# Altium PCB 1.8A.PcbDoc
Units mm, origin at the board's own origin, x right, y up, seen from the top; angles counter-clockwise.
Board outline 69 x 27 mm, 2 copper layers (Top Layer, Bottom Layer); 22 components, 24 nets, 63 pads, 30 vias.
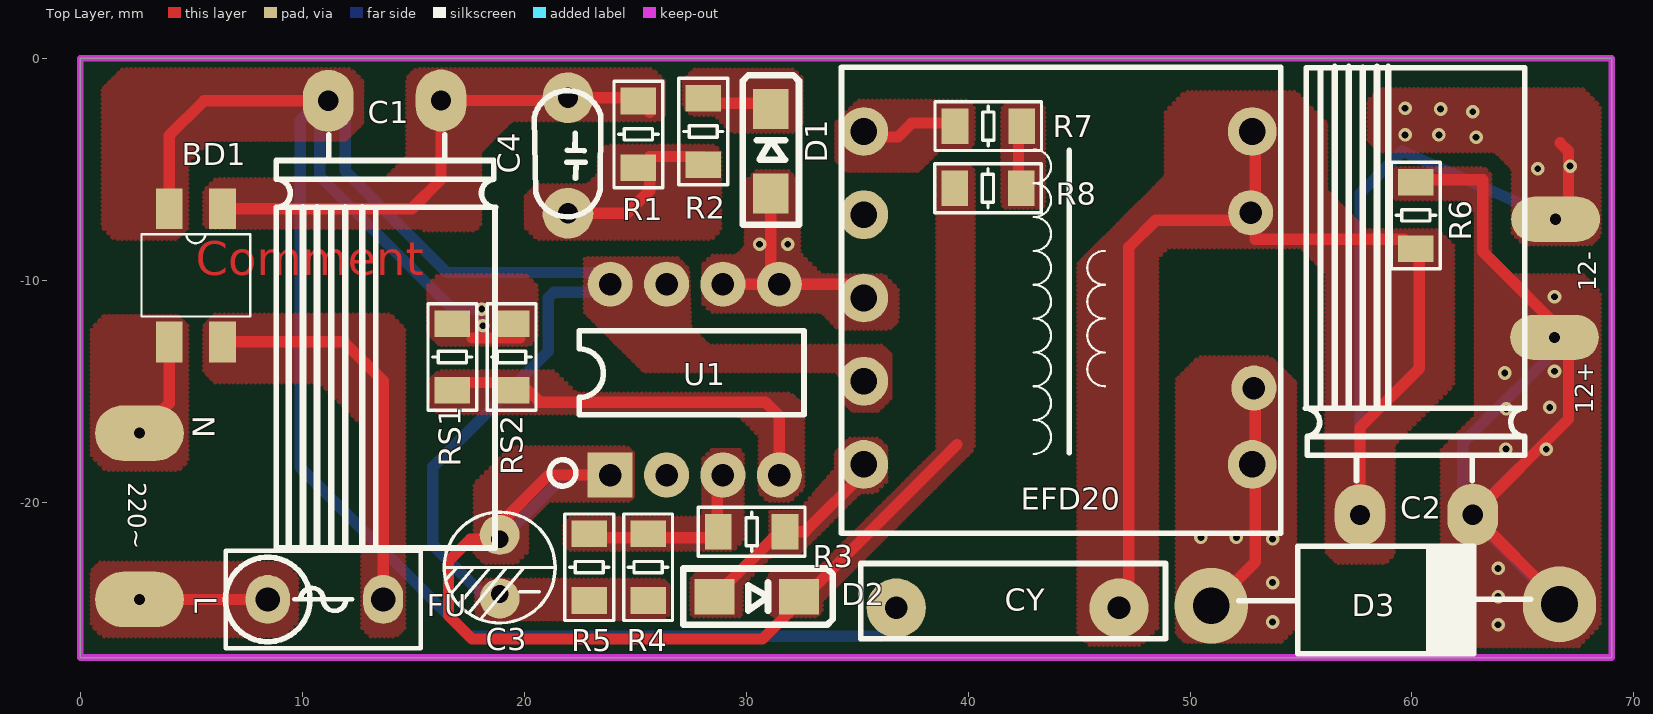
[diagram p0: Top Layer view]
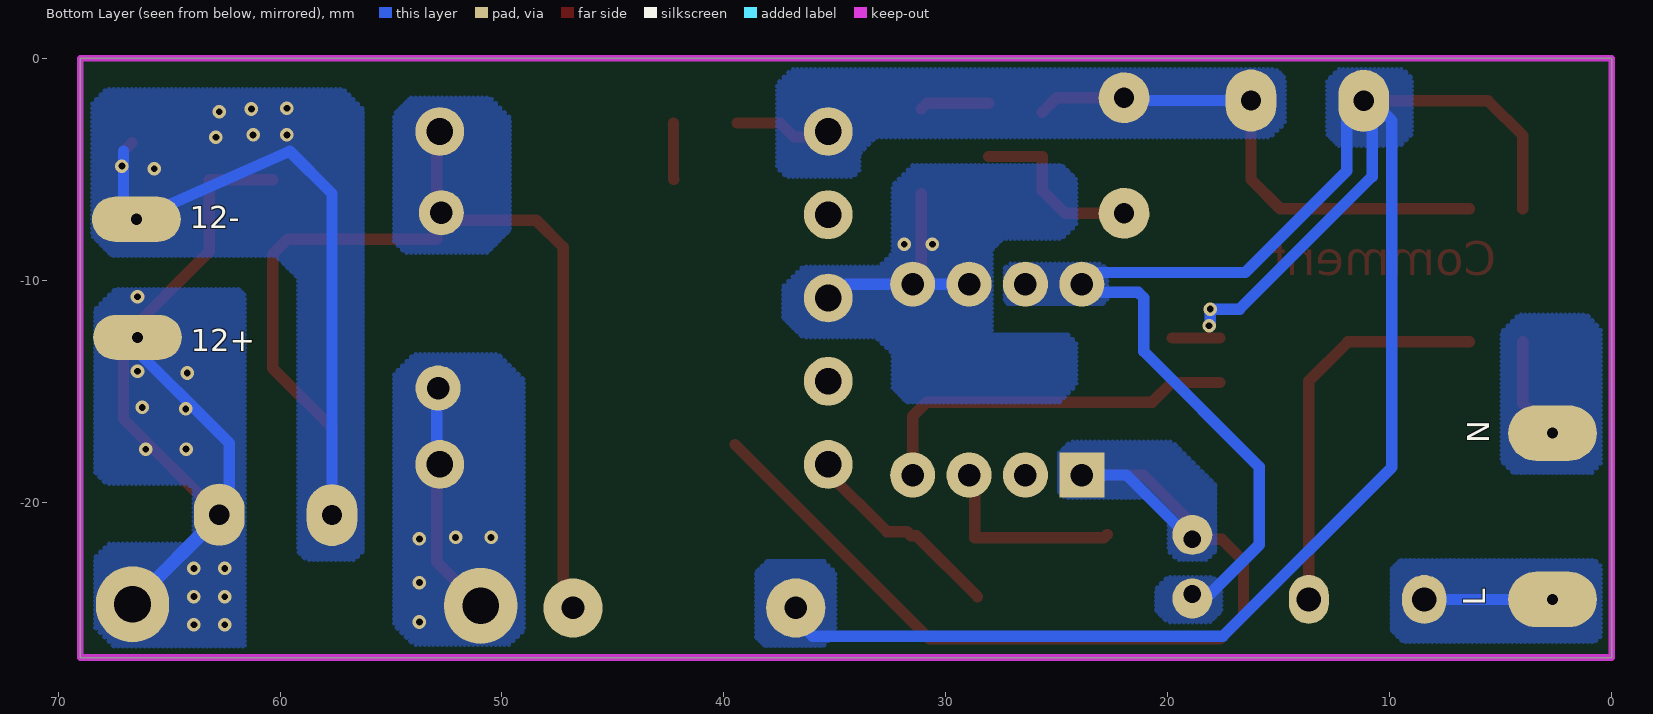
[diagram p1: Bottom Layer view, seen from below]

## Layer stack, top to bottom
Top Solder: solder mask 0.0102, Solder Resist, Dk 3.5
Top Layer: signal copper 0.0356
Dielectric 1: dielectric 0.32, FR-4, Dk 4.8
Bottom Layer: signal copper 0.0356
Bottom Solder: solder mask 0.0102, Solder Resist, Dk 3.5

## Board outline
0,-27 69,-27 69,0 0,0

## Design rules (kind name [scope] priority, off if disabled: settings)
Clearance [All] p1: gap=0.254 ignorepadtopadclearanceinfootprint=FALSE except(0: Arc-Hole Track-Hole SMDPad-Hole THPad-Hole Via-Hole Fill-Hole Poly-Hole Region-Hole Text-Hole)
PolygonConnect [All] p1: connectstyle=Direct reliefconductorwidth=0.254 reliefentries=4 polygonreliefangle="90 Angle" airgapwidth=0.254
RoutingVias [All] p1: holewidth=0.711 width=1.27 viastyle="Through Hole" minholewidth=0.711 minwidth=1.27 maxholewidth=0.711 maxwidth=1.27
SolderMaskExpansion [All] p1: expansion=0.102
Width [All] p1: maxlimit=0.508 minlimit=0.254 preferedwidth=0.254
30 further rules are at their usual default settings.

## Components (designator, comment, footprint, x,y, rotation, side; value= is the part's Value field where it differs from the comment)
BD1 "Comment" MBL10S 5.207,-9.779 r0 top
C1 "Comment" 电解电容10*13mm 13.716,-1.913 r180 top
C2 "Comment" 电解电容10*13mm 60.198,-20.574 r0 top
C3 "Comment" 直插电解电容5*11mm 18.899,-22.908 r90 top
C4 "Comment" CAP 25.273,-4.763 r90 top
CY "Comment" 222M/400v 41.783,-24.765 r0 top
D1 "Comment" SMAF 31.115,-4.191 r270 top
D2 "Comment" SMAF 30.48,-24.257 r180 top
D3 "Comment" DO-201AD/SR5100 58.801,-24.638 r0 top
EFD20 "Comment" EFD20 44.3,-10.8 r0 top
FU "Comment" 方块保险丝 11.049,-24.384 r0 top
R1 "Comment" R1206 25.146,-3.429 r90 top
R2 "Comment" R1206 28.067,-3.302 r90 top
R3 "Comment" R1206 30.25,-21.33 r0 top
R4 "Comment" R1206 25.58,-22.93 r90 top
R5 "Comment" R1206 22.932,-22.93 r90 top
R6 "Comment" R1206 60.18,-7.08 r270 top
R7 "Comment" R1206 40.911,-3.054 r0 top
R8 "Comment" R1206 40.894,-5.854 r0 top
RS1 "Comment" R1206 16.764,-13.462 r90 top
RS2 "Comment" R1206 19.431,-13.462 r90 top
U1 "Comment" DIP-8 27.686,-14.478 r90 top

## Footprints (in the part's own frame and the unit in brackets; to place one, negate y for a bottom-side part, rotate by r counter-clockwise, add the part's x,y. Pads: shape width x height; smd on the part's side, far side on the other; paste and mask are expansions set on the pad)
222M/400v [mil]
  round 105 hole 40: 1(-197.5,0) 2(197.5,0)
  silkscreen extent -261,-54 280,79
CAP [mil]
  round 90 hole 36: 1(-87.5,130) 2(117.5,130)
  silkscreen extent -94,72 130,190
DIP-8 [mil]
  rect 80x80 hole 40: 1(-169.29,150)
  round 80 hole 40: 2(-169.29,50) 3(-169.29,-50) 4(-169.29,-150) 5(169.29,-150) 6(169.29,-50) 7(169.29,50) 8(169.29,150)
  silkscreen extent -189,-194 87,258
DO-201AD/SR5100 [mil]
  oval 130x135 hole 65: 1(-308.75,-1.25) 2(308.75,1.25)
  silkscreen extent -260,-86 258,104
EFD20 [mm]
  round 2.2 hole 1.2: 1(-9,7.5) 2(-9,3.75) 3(-9,0) 4(-9,-3.75) 5(-9,-7.5) 6(8.5,-7.5) 7(8.5,7.5)
  silkscreen extent -10,-10.6 9.78,10.4
MBL10S [mm]
  rect 1.2x1.84 smd: 1(-1.2,3) 2(-1.2,-3) 3(1.2,3) 4(1.2,-3)
  silkscreen extent -2.44,-1.85 2.46,1.85
R1206 [mm]
  rect 1.2x1.6 smd: 1(-1.5,0) 2(1.5,0)
  silkscreen extent -2.4,-1.1 2.4,1.1
SMAF [mm]
  rect 1.8x1.6 smd: 1(-1.9,0) 2(1.9,0)
  silkscreen extent -3.42,-1.27 3.31,1.27
方块保险丝 [mm]
  oval 2x2.2 hole 1.1: 1(-2.6,0)
  oval 1.8x2.2 hole 1.1: 2(2.6,0)
  silkscreen extent -4.5,-2.2 4.3,2.2
电解电容10*13mm [mil]
  oval 90x110 hole 36: 1(100,0.31) 2(-100,-0.31)
  silkscreen extent -197,60 192,793
直插电解电容5*11mm [mm]
  round 1.8 hole 0.8 copper offset 0.2,0: 1(1.232,0)
  round 1.8 hole 0.8 copper offset -0.2,0: 2(-1.232,0)
  silkscreen extent -2.54,-2.5 2.46,2.5

## Free pads (board coordinates)
  oval 4x2.5 hole 0.5 unplated: ""(2.667,-24.384) ""(2.667,-16.891)
  round 2.032 hole 1.016 unplated: ""(52.73,-6.96) ""(52.88,-14.86)
  oval 4x2.032 hole 0.5 unplated: ""(66.421,-12.573) ""(66.47,-7.254)

## Via types
v1: diameter 0.61, hole 0.305, Top Layer to Bottom Layer, tented both sides, 30 vias

## Nets (pads, with @x,y where several pads share a name; then routed paths per layer and width w, separated by ;. In a path a pad name is that pad's centre, name@x,y a point inside that pad or via, vN(x,y) a via of type N, cw(c..) or ccw(c..) an arc to the next point about the centre after c; other vN are vias at no path point)
1: FU.1 pad.@2.667,-24.384 | length 11.6
  Top Layer w0.508: pad.@2.667,-24.384 FU.1
  Bottom Layer w0.508: pad.@2.667,-24.384 FU.1
2: BD1.3 C1.2 C4.2 EFD20.1 R1.2 R7.1 | length 33.7
  Top Layer w0.508: BD1.3 14.938,-6.779 16.256,-5.461 C1.2 21.844,-1.905 C4.2 25.003,-1.778 R1.2@25.654,-2.429 ; EFD20.1@35.442,-3.549 36.837,-3.549 37.465,-2.921 R7.1@39.411,-2.921
  Bottom Layer w0.508: C1.2 21.844,-1.905 C4.2
3: C4.1 R1.1 R2.1 | length 8.1
  Top Layer w0.508: C4.1 24.638,-6.985 25.654,-5.969 25.654,-4.429 R2.1@28.067,-4.429
4: D1.1 R2.2 | length 3.2
  Top Layer w0.508: R2.2@28.067,-2.032 30.856,-2.032 D1.1
5: D1.2 EFD20.3 U1.5 U1.6 | length 17.1
  Top Layer w0.508: U1.6 U1.5 ; D1.2 31.115,-9.797 U1.5 ; EFD20.3@35.01,-10.89 34.487,-10.178 U1.5
  Bottom Layer w0.508: U1.6 U1.5 34.487,-10.178 EFD20.3@35.01,-10.89
  other v1: 30.607,-8.382 31.877,-8.382
6: 
7: R7.2 R8.2 | length 2.5
  Top Layer w0.508: R8.2@42.259,-5.461 42.275,-5.445 R7.2@42.275,-2.921
8: C3.1 D2.1 R8.1 U1.1 | length 44.8
  Top Layer w0.508: U1.1 21.1,-18.778 18.899,-20.979 18.899,-21.666 17.577,-21.666 16.591,-22.652 16.591,-25.1 17.653,-26.162 30.734,-26.162 39.497,-17.399
  Bottom Layer w0.508: C3.1@18.974,-21.666 21.862,-18.778 U1.1
9: D2.2 EFD20.5 R3.2 | length 9.2
  Top Layer w0.508: D2.2 31.326,-21.511 31.569,-21.511 R3.2 32.661,-21.33 EFD20.5@35.442,-18.549
10: R3.1 R4.2 R5.2 U1.3 | length 9
  Top Layer w0.508: R5.2@22.733,-21.454 22.885,-21.606 25.58,-21.606 28.702,-21.606 28.702,-19.032 U1.3
11: 
12: RS1.1 RS2.1 U1.4 | length 17.1
  Top Layer w0.508: 17.653,-14.605 19.812,-14.605 20.701,-15.494 30.861,-15.494 31.496,-16.129 U1.4
12V: 
13: BD1.1 C1.1 C3.2 CY.1 EFD20.4 R4.1 R5.1 RS1.2 RS2.2 U1.7 U1.8 | length 114.7
  Top Layer w0.508: BD1.1 4.007,-3.486 5.572,-1.921 C1.1 ; 17.653,-12.605 19.812,-12.605
  Bottom Layer w0.508: C1.1@10.795,-1.921 9.906,-2.81 9.906,-18.426 17.515,-26.035 36.005,-26.035 CY.1@37.274,-24.765 ; v1@18.089,-12.054 v1(18.089,-11.303) 16.764,-11.303 10.795,-5.334 10.795,-2.302 C1.1 11.938,-1.921 11.938,-5.08 16.51,-9.652 23.35,-9.652 U1.8 23.513,-10.541 21.336,-10.541 21.082,-10.795 21.082,-13.208 15.88,-18.41 15.88,-21.92 18.899,-24.939 C3.2 C3.2@18.899,-24.13
  other v1: 18.14,-12.054
14: BD1.4 FU.2 | length 17.8
  Top Layer w0.508: BD1.4 11.89,-12.779 13.649,-14.538 FU.2
15: C2.2 CY.2 EFD20.7 pad.@52.73,-6.96 pad.@66.47,-7.254 R6.2 | length 78.4
  Top Layer w0.508: CY.2@47.244,-24.13 47.244,-8.509 48.454,-7.299 pad.@52.942,-7.299 ; EFD20.7@53.203,-3.81 52.942,-3.549 pad.@52.942,-7.299 ; C2.2 57.658,-16.637 60.325,-13.97 60.325,-8.823 59.652,-8.15 52.942,-8.15 pad.@52.942,-7.299 ; 66.675,-3.81 67.056,-4.191 pad.@67.056,-7.112
  Bottom Layer w0.508: C2.2 57.658,-6.096 59.563,-4.191 pad.@66.47,-7.254 ; pad.@67.056,-7.112 67.056,-4.191
  other v1: 65.67,-4.98 67.12,-4.86 62.889,-3.556 59.69,-3.454 61.214,-3.454 62.738,-2.413 61.289,-2.286 59.69,-2.254
16: D3.1 EFD20.6 pad.@52.88,-14.86 | length 14.4
  Top Layer w0.508: D3.1 52.942,-22.687 pad.@52.942,-14.799
  Bottom Layer w0.508: EFD20.6@52.942,-18.549 pad.@52.942,-14.799
  other v1: 53.721,-25.4 53.721,-23.622 53.721,-21.654 50.489,-21.59 52.089,-21.59
17: 
18: C2.1 D3.2 pad.@66.421,-12.573 R6.1 | length 48.5
  Top Layer w0.508: R6.1@60.325,-5.477 63.19,-5.477 63.19,-8.707 67.056,-12.573 67.056,-16.248 C2.1 66.643,-24.471 D3.2
  Bottom Layer w0.508: C2.1 66.643,-24.471 D3.2 62.289,-20.252 62.289,-17.34 pad.@67.056,-12.573
  other v1: 62.489,-25.527 63.881,-25.527 62.489,-24.257 63.881,-24.254 62.489,-22.987 63.881,-22.987 66.049,-17.62 64.23,-17.61 64.25,-15.8 66.21,-15.73 64.18,-14.18 66.421,-14.097 66.421,-10.741
19: BD1.2 pad.@2.667,-16.891 | length 4.7
  Top Layer w0.508: pad.@2.667,-16.891 4.007,-15.551 BD1.2
20: 
21: 
22: 
NewNet: 
pads on no net: EFD20.2 U1.2

## Polygon pours and split planes (outlines as drawn)
8 on Top Layer "8_L01_P040" (hatched 90Degree grid 0.2 track 0.2, remove dead copper, pour order 40): 38.735,-4.826 40.005,-4.826 40.259,-5.08 40.259,-17.571 33.24,-24.59 31.671,-24.59 38.608,-17.653 38.608,-4.953
7 on Top Layer "7_L01_P036" (hatched 90Degree grid 0.2 track 0.2, remove dead copper, pour order 36): 41.783,-2.032 43.18,-2.032 43.434,-2.286 43.434,-6.604 43.307,-6.731 41.656,-6.731 41.529,-6.604 41.529,-2.286
2 on Top Layer "2_L01_P034" (hatched 90Degree grid 0.2 track 0.2, remove dead copper, pour order 34): 40.005,-1.905 35.069,-1.905 34.053,-2.921 34.053,-4.572 34.561,-5.08 37.736,-5.08 38.752,-4.064 40.005,-4.064 40.259,-3.81 40.259,-2.159
8 on Top Layer "8_L01_P084" (hatched 90Degree grid 0.2 track 0.2, remove dead copper, pour order 84): 31.242,-23.114 33.184,-23.114 33.401,-23.331 33.401,-24.892 33.147,-25.146 31.242,-25.146 30.988,-24.892 30.988,-23.368
10 on Top Layer "10_L01_P026" (hatched 90Degree grid 0.2 track 0.2, remove dead copper, pour order 26): 28.448,-17.653 29.718,-17.653 29.845,-17.78 29.845,-21.717 29.412,-22.15 22.06,-22.15 21.8,-21.89 21.8,-20.93 22.03,-20.7 27.941,-20.7 28.067,-20.574 28.067,-18.034
13 on Top Layer "13_L01_P024" (hatched 90Degree grid 0.2 track 0.2, remove dead copper, pour order 24): 18.215,-23.495 22.606,-23.495 26.245,-23.495 26.5,-23.75 26.5,-25.06 26.287,-25.273 18.113,-25.273 17.85,-25.01 17.85,-23.86
9 on Top Layer "9_L01_P028" (hatched 90Degree grid 0.2 track 0.2, remove dead copper, pour order 28): 35.645,-17.143 35.939,-17.143 36.322,-17.526 36.322,-19.05 35.816,-19.556 35.124,-19.556 32.32,-22.36 31.19,-22.36 29.803,-23.747 29.803,-25.017 29.676,-25.144 27.644,-25.144 27.517,-25.017 27.517,-23.493 27.771,-23.239 29.549,-23.239 31.09,-21.698 31.09,-20.42 32.382,-20.42 34.036,-18.498 34.036,-17.78 34.673,-17.143
5 on Top Layer "5_L01_P018" (hatched 90Degree grid 0.2 track 0.2, remove dead copper, pour order 18): 30.48,-5.08 31.877,-5.08 32.385,-5.588 32.385,-8.763 33.401,-9.779 36.195,-9.779 36.83,-10.414 36.83,-11.811 36.449,-12.192 34.163,-12.192 33.401,-11.43 28.448,-11.43 28.067,-11.049 28.067,-9.271 28.448,-8.89 29.591,-8.89 29.972,-8.509 29.972,-5.588
13 on Top Layer "13_L01_P070" (hatched 90Degree grid 0.2 track 0.2, remove dead copper, pour order 70): 16.21,-12.91 20.24,-12.91 20.574,-12.576 20.574,-10.287 20.066,-9.779 16.129,-9.779 15.684,-10.223 15.684,-12.384
8 on Top Layer "8_L01_P022" (hatched 90Degree grid 0.2 track 0.2, remove dead copper, pour order 22): 24.892,-17.78 24.892,-19.758 24.711,-19.939 21.111,-19.939 20.13,-20.92 20.13,-22.24 19.637,-22.733 18.223,-22.733 17.78,-22.29 17.78,-19.16 19.414,-17.526 24.638,-17.526
12 on Top Layer "12_L01_P020" (hatched 90Degree grid 0.2 track 0.2, remove dead copper, pour order 20): 16.173,-14.097 21.336,-14.097 22.352,-15.113 32.004,-15.113 32.557,-15.639 32.575,-16.002 32.575,-19.368 32.004,-19.939 30.988,-19.939 30.607,-19.558 30.607,-17.018 29.591,-16.002 16.172,-16.002 15.71,-15.54 15.71,-14.56
13 on Top Layer "13_L01_P016" (hatched 90Degree grid 0.2 track 0.2, remove dead copper, pour order 16): 27.387,-9.481 27.478,-12.131 28.33,-12.954 36.108,-12.954 36.489,-13.335 36.489,-15.327 35.941,-15.875 34.798,-15.875 34.29,-15.367 34.29,-14.351 34.036,-14.097 25.4,-14.097 22.733,-11.43 22.733,-9.017 26.906,-9.017
15 on Top Layer "15_L01_P044" (hatched 90Degree grid 0.2 track 0.2, remove dead copper, pour order 44): 45.466,-26.416 47.752,-26.416 48.514,-25.654 48.514,-9.017 49.022,-8.509 54.991,-8.509 56.134,-9.652 56.134,-22.225 56.642,-22.733 58.801,-22.733 59.182,-22.352 59.182,-17.399 61.849,-14.732 61.849,-8.439 61.157,-7.747 57.912,-7.747 56.134,-5.969 56.134,-2.921 54.737,-1.524 49.784,-1.524 48.895,-2.413 48.895,-5.334 44.958,-9.271 44.958,-25.908
16 on Top Layer "16_L01_P042" (hatched 90Degree grid 0.2 track 0.2, remove dead copper, pour order 42): 49.784,-26.289 54.102,-26.289 54.737,-25.654 54.737,-14.605 53.594,-13.462 50.419,-13.462 49.403,-14.478 49.403,-25.908
4 on Top Layer "4_L01_P014" (hatched 90Degree grid 0.2 track 0.2, remove dead copper, pour order 14): 27.686,-0.508 32.131,-0.508 32.512,-0.889 32.512,-2.921 32.131,-3.302 29.337,-3.302 29.21,-3.175 28.575,-2.54 27.559,-2.54 27.178,-2.159 27.178,-1.016
3 on Top Layer "3_L01_P012" (hatched 90Degree grid 0.2 track 0.2, remove dead copper, pour order 12): 28.829,-4.191 28.829,-7.747 28.448,-8.128 20.574,-8.128 20.066,-7.62 20.066,-6.223 20.574,-5.715 22.86,-5.715 23.368,-5.207 23.368,-4.318 23.749,-3.937 28.575,-3.937
2 on Top Layer "2_L01_P010" (hatched 90Degree grid 0.2 track 0.2, remove dead copper, pour order 10): 5.588,-7.493 5.588,-5.969 6.096,-5.461 13.716,-5.461 14.732,-4.445 14.732,-0.889 15.367,-0.254 25.527,-0.254 26.289,-1.016 26.289,-2.54 26.035,-2.794 19.431,-2.794 18.034,-4.191 18.034,-7.493 17.78,-7.747 5.842,-7.747
13 on Top Layer "13_L01_P008" (hatched 90Degree grid 0.2 track 0.2, remove dead copper, pour order 8): 4.318,-8.128 1.524,-8.128 1.016,-7.62 1.016,-1.397 2.159,-0.254 11.938,-0.254 12.7,-1.016 12.7,-2.921 11.938,-3.683 5.842,-3.683 4.826,-4.699 4.826,-7.62
14 on Top Layer "14_L01_P006" (hatched 90Degree grid 0.2 track 0.2, remove dead copper, pour order 6): 6.096,-11.557 13.97,-11.557 14.605,-12.192 14.605,-25.654 14.224,-26.035 13.081,-26.035 12.7,-25.654 12.7,-16.51 10.795,-14.605 6.096,-14.605 5.588,-14.097 5.588,-12.065
1 on Top Layer "1_L01_P004" (hatched 90Degree grid 0.2 track 0.2, remove dead copper, pour order 4): 0.889,-22.733 9.144,-22.733 9.779,-23.368 9.779,-25.4 9.144,-26.035 1.016,-26.035 0.508,-25.527 0.508,-23.114
19 on Top Layer "19_L01_P000" (hatched 90Degree grid 0.2 track 0.2, remove dead copper, pour order 0): 0.508,-12.192 1.067,-11.633 4.394,-11.633 4.826,-12.065 4.826,-18.161 4.445,-18.542 1.143,-18.542 0.508,-17.907
18 on Top Layer "18_L01_P046" (hatched 90Degree grid 0.2 track 0.2, remove dead copper, pour order 46): 68.453,-10.541 68.453,-25.527 67.183,-26.797 62.484,-26.797 61.341,-25.654 61.341,-17.653 62.865,-16.129 62.865,-6.995 62.22,-6.35 59.309,-6.35 58.928,-5.969 58.928,-5.207 59.182,-4.953 63.246,-4.953 63.516,-5.223 63.516,-9.287 64.008,-9.779 67.691,-9.779
15 on Top Layer "15_L01_P086" (hatched 90Degree grid 0.2 track 0.2, remove dead copper, pour order 86): 65.014,-8.382 68.072,-8.382 68.453,-8.001 68.453,-2.159 67.691,-1.397 58.547,-1.397 58.039,-1.905 58.039,-3.683 58.547,-4.191 63.754,-4.191 64.535,-4.972 64.535,-7.884
13 on Bottom Layer "13_L02_P082" (hatched 90Degree grid 0.2 track 0.2, remove dead copper, pour order 82): 35.501,-22.653 38.041,-22.653 38.549,-23.161 38.549,-26.082 38.168,-26.463 35.501,-26.463 34.993,-25.955 34.993,-23.161
15 on Bottom Layer "15_L02_P080" (hatched 90Degree grid 0.2 track 0.2, remove dead copper, pour order 80): 50.546,-1.778 54.102,-1.778 54.864,-2.54 54.864,-8.255 54.356,-8.763 50.673,-8.763 49.657,-7.747 49.657,-2.667
13 on Bottom Layer "13_L02_P078" (hatched 90Degree grid 0.2 track 0.2, remove dead copper, pour order 78): 17.974,-23.376 20.006,-23.376 20.514,-23.884 20.514,-24.9 20.006,-25.408 18.101,-25.408 17.593,-24.9 17.593,-23.757
8 on Bottom Layer "8_L02_P062" (hatched 90Degree grid 0.2 track 0.2, remove dead copper, pour order 62): 24.892,-17.78 24.892,-19.558 24.638,-19.812 20.898,-19.812 19.95,-20.76 19.95,-22.22 19.564,-22.606 18.266,-22.606 17.87,-22.21 17.87,-19.214 19.812,-17.272 24.384,-17.272
1 on Bottom Layer "1_L02_P068" (hatched 90Degree grid 0.2 track 0.2, remove dead copper, pour order 68): 0.762,-22.606 9.525,-22.606 9.906,-22.987 9.906,-25.781 9.398,-26.289 0.762,-26.289 0.381,-25.908 0.381,-22.987
13 on Bottom Layer "13_L02_P074" (hatched 90Degree grid 0.2 track 0.2, remove dead copper, pour order 74): 23.004,-9.254 27.159,-9.254 27.359,-9.454 27.359,-10.906 27.211,-11.054 26.967,-11.054 22.933,-11.054 22.733,-10.854 22.733,-9.525
13 on Bottom Layer "13_L02_P076" (hatched 90Degree grid 0.2 track 0.2, remove dead copper, pour order 76): 9.525,-0.381 12.192,-0.381 12.827,-1.016 12.827,-1.27 12.827,-3.429 12.319,-3.937 9.525,-3.937 9.017,-3.429 9.017,-0.889
15 on Bottom Layer "15_L02_P072" (hatched 90Degree grid 0.2 track 0.2, remove dead copper, pour order 72): 61.972,-1.397 57.15,-1.397 56.261,-2.286 56.261,-22.225 56.642,-22.606 58.801,-22.606 59.182,-22.225 59.182,-9.906 60.198,-8.89 62.489,-8.89
19 on Bottom Layer "19_L02_P066" (hatched 90Degree grid 0.2 track 0.2, remove dead copper, pour order 66): 1.143,-11.557 4.191,-11.557 4.953,-12.319 4.953,-18.161 4.445,-18.669 0.889,-18.669 0.381,-18.161 0.381,-12.319
5 on Bottom Layer "5_L02_P052" (hatched 90Degree grid 0.2 track 0.2, remove dead copper, pour order 52): 24.13,-12.827 24.13,-14.732 24.892,-15.494 27.94,-15.494 31.75,-15.494 32.385,-14.859 32.385,-13.335 33.147,-12.573 36.449,-12.573 37.338,-11.684 37.338,-10.287 36.449,-9.398 33.02,-9.398 32.385,-8.763 32.385,-5.715 31.496,-4.826 24.765,-4.826 24.13,-5.461 24.13,-7.493 24.765,-8.128 27.432,-8.128 27.94,-8.636 27.94,-12.446 24.511,-12.446
18 on Bottom Layer "18_L02_P054" (hatched 90Degree grid 0.2 track 0.2, remove dead copper, pour order 54): 61.849,-10.414 67.437,-10.414 68.326,-11.303 68.326,-18.669 67.818,-19.177 64.135,-19.177 63.881,-19.431 63.881,-21.881 67.728,-21.881 68.326,-22.479 68.326,-25.654 67.31,-26.67 61.595,-26.67 61.595,-10.668
15 on Bottom Layer "15_L02_P056" (hatched 90Degree grid 0.2 track 0.2, remove dead copper, pour order 56): 61.225,-1.397 67.829,-1.397 68.464,-2.032 68.464,-8.001 67.575,-8.89 61.606,-8.89 60.336,-7.62 60.336,-2.286
16 on Bottom Layer "16_L02_P060" (hatched 90Degree grid 0.2 track 0.2, remove dead copper, pour order 60): 50.165,-13.335 53.975,-13.335 54.864,-14.224 54.864,-25.527 53.975,-26.416 49.657,-26.416 49.022,-25.781 49.022,-14.478
2 on Bottom Layer "2_L02_P064" (hatched 90Degree grid 0.2 track 0.2, remove dead copper, pour order 64): 15.24,-0.381 36.83,-0.381 37.592,-1.143 37.592,-3.556 37.592,-4.953 37.211,-5.334 34.163,-5.334 33.909,-5.08 33.909,-4.318 33.147,-3.556 15.367,-3.556 14.732,-2.921 14.732,-0.889

## Keep-outs
Keep-Out Layer:
  the board outline again, w0.3

## Silkscreen, mask and mechanical layers (free items; w line width, h text height)
Top Overlay:
  text "12-" at 68.31,-10.49 h0.8 r90
  text "12+" at 68.16,-16.02 h0.8 r90
  text "N" at 6.06,-17.13 h1 r90
  text "220~" at 2.17,-19.11 h0.8 r270
  text "L" at 5.17,-24.25 h1 r270
Bottom Overlay:
  text "12-" at 64.06,-7.66 h1
  text "12+" at 64.02,-13.19 h1
  text "N" at 5.53,-17.35 h1 r270
  text "L" at 5.69,-24.66 h1 r270